# Altium PCB PCB_GUNV_2.PcbDoc
Units mm, origin at the board's own origin, x right, y up, seen from the top; angles counter-clockwise.
Board outline 14.5 x 13.7 mm, 2 copper layers (Top Layer, Bottom Layer), stack 1.036 mm thick; 34 components, 16 nets, 67 pads, 18 vias.
Unrouted connection lines stored in the file: 50.
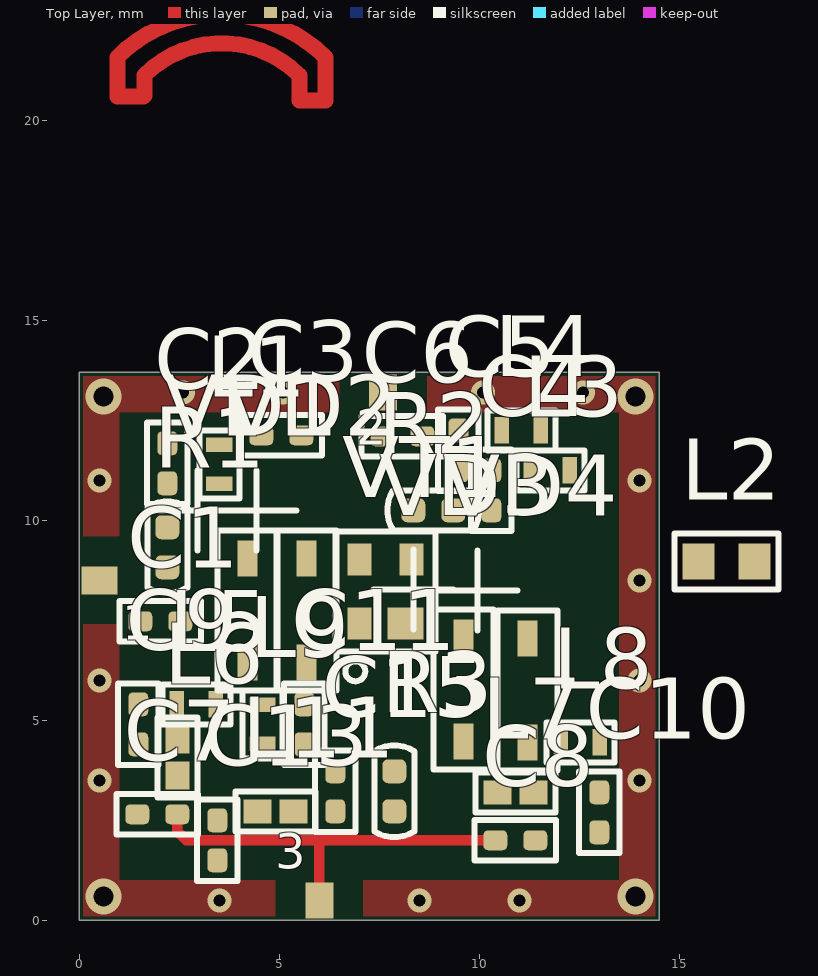
[diagram p0: Top Layer view]
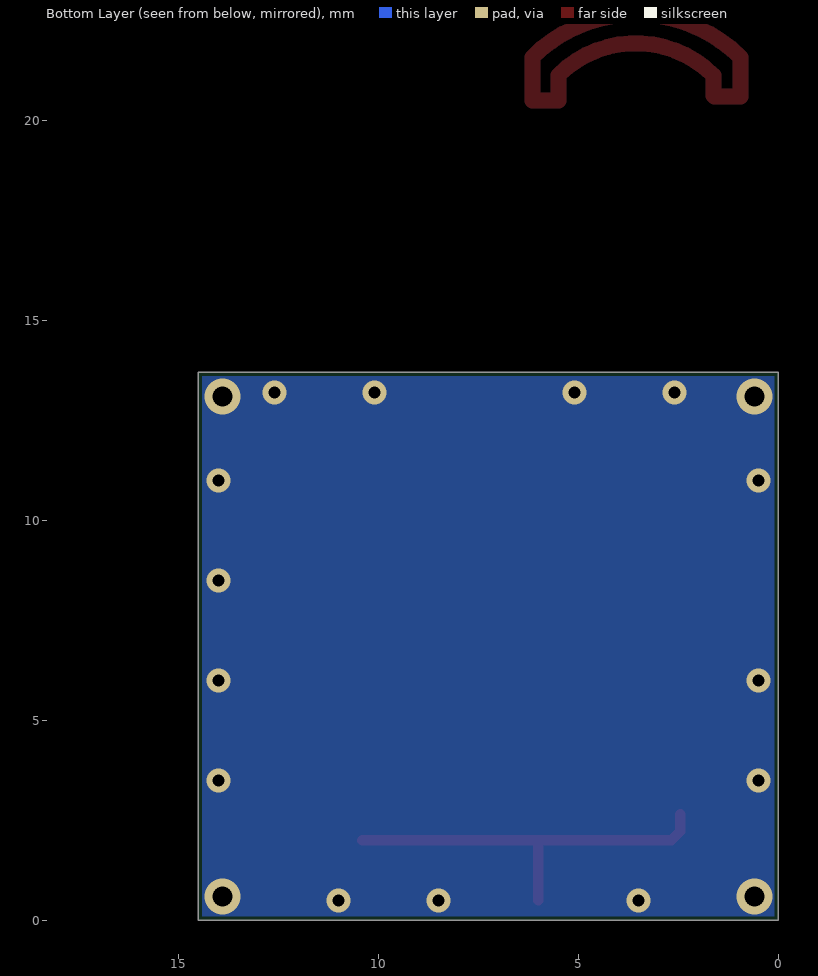
[diagram p1: Bottom Layer view, seen from below]

## Layer stack, top to bottom
Top Solder: solder mask 0.025, Solder Resist, Dk 3.5
Top Layer: signal copper 0.018
Dielectric 1: core 1, FR4, Dk 4.6
Bottom Layer: signal copper 0.018
Bottom Solder: solder mask 0.025, Solder Resist, Dk 3.5

## Board outline
0,0 0,13.7 14.5,13.7 14.5,0

## Design rules (kind name [scope] priority, off if disabled: settings)
Clearance [All] p1: gap=0.3 ignorepadtopadclearanceinfootprint=FALSE
ComponentClearance [All] p1: gap=0.2 collisioncheckmode=3 verticalgap=5 showdistances=FALSE
HoleSize [All] p1: absolutevalues=TRUE maxlimit=5 minlimit=0.025 maxpercent=80.000 minpercent=20.000
HoleToHoleClearance [All] p1: gap=0.3 allowstackedmicrovias=TRUE
MinimumSolderMaskSliver [All] p1: minsoldermaskwidth=0.12
PlaneConnect [All] p1: planeconnectstyle=Direct reliefexpansion=0.508 reliefentries=4 reliefconductorwidth=0.254 reliefairgap=0.254
PolygonConnect [All] p1: connectstyle=Direct reliefconductorwidth=0.254 reliefentries=4 polygonreliefangle="90 Angle" airgapwidth=0.254
RoomDefinition Sheet1 [InComponentClass('Sheet1')] p1: confinementstyle=ConfineIn formatcopy=TRUE lockcomponents=FALSE outline 15.629,1.551 150.729,1.551 150.729,7.651 15.629,7.651
RoutingVias [All] p1: holewidth=0.711 width=1.27 viastyle="Through Hole" minholewidth=0.711 minwidth=1.27 maxholewidth=0.711 maxwidth=1.27
ShortCircuit [All] p1: allowed=TRUE
SilkToSilkClearance [All] p1: silktosilkclearance=0
SilkToSolderMaskClearance [IsPad] p1: minsilkscreentomaskgap=0 clearancetoexposedcopper=TRUE
SolderMaskExpansion [All] p1: expansion=0.12
Width [All] p1: maxlimit=0.5 minlimit=0.254 preferedwidth=0.3 minimp=50.000000 maximp=50.000000 favimp=50.000000
22 further rules are at their usual default settings.

## Components (designator, comment, footprint, x,y, rotation, side; value= is the part's Value field where it differs from the comment)
1 "TP" TP1#1 0.5,8.5 r90 top locked
2 "TP" TP1#2 7.6,13.2 r90 top locked
3 "TP" TP1#3 6,0.5 r90 top locked
C1 "330" CAPC1005L 2.025,7.475 r0 top
C2 "330" CAPC1005L 2.2,11.425 r270 top
C3 "12" CAPC1005L 5.05,12.125 r180 top
C4 "{Value}" CAPC1005L 10.3,10.75 r270 top
C5 "{Value}" CAPC1005L 9.475,11.75 r270 top
C6 "{Value}" CAPC1005L 8.075,12.1 r0 top
C7 "330" CAPC1005L 1.95,2.65 r0 top
C8 "330" CAPC1005L 10.9,2 r180 top
C9 "33" CAPC1005L 1.475,4.9 r270 top
C10 "33" CAPC1005L 13,2.7 r270 top
C11 "100" CAPC1005L 5.625,4.9 r90 top
C13 "100" CAPC1005L 3.45,2 r90 top
C15 "330" CAPC1005L 6.4,3.225 r270 top
L1 "16" INDC1107X07N 3.5,11.4 r0 top
L2 "180" INDC1608L 16.175,8.975 r0 top
L3 "{Value}" INDC1107X07N 11.775,11.25 r90 top
L4 "{Value}" INDC1107X07N 11.05,12.25 r90 top
L5 "39" INDC1107X07N 2.925,5.4 r90 top
L6 "100" INDC1005L 2.45,4.075 r90 top
L7 "100" INDC1005L 10.9,3.2 r180 top
L8 "39" INDC1107X07N 12.525,4.45 r90 top
L9 "39" INDC1107X07N 4.575,4.9 r180 top
L11 "220" INDC1005L 4.9,2.725 r0 top
R1 "330" RESC1005L 2.2,9.325 r90 top
R2 "{Value}" RESC1005L 8.85,10.25 r180 top
R3 "1 к" RESC1005L 7.875,3.225 r270 top
VD1 "BB149" SOD2512X100N 4.2,7.75 r90 top
VD2 "BB149" SOD2512X100N 5.675,7.75 r90 top
VD3 "BB149" SOD2512X100N 9.6,5.775 r90 top
VD4 "BB149" SOD2512X100N 11.2,5.75 r90 top
VT1 "" SOT130P210X100-4N 7.65,8.225 r0 top

## Footprints (in the part's own frame and the unit in brackets; to place one, negate y for a bottom-side part, rotate by r counter-clockwise, add the part's x,y. Pads: shape width x height; smd on the part's side, far side on the other; paste and mask are expansions set on the pad)
CAPC1005L [mm] "Chip Capacitor, Body 1.0x0.5mm, IPC High Density"
  rrect50% 0.6x0.5 smd: 1(-0.5,0) 2(0.5,0)
  Top Layer pour cut-out: -0.2,0.5 -0.2,-0.5 0.2,-0.5 0.2,0.5
  silkscreen extent -1.02,-0.51 1.02,0.51, body extent -0.55,-0.3 0.55,0.3, height 0.6
INDC1005L [mm] "Chip Inductor, Body 1.0x0.5mm, IPC High Density"
  rect 0.7x0.6 smd: 1(-0.45,0) 2(0.45,0)
  silkscreen extent -1,-0.5 1,0.5, body extent -0.55,-0.35 0.55,0.35, height 0.6
INDC1107X07N [mm] "Chip Inductor, 2-Leads, Body 1,11x0,66mm, IPC Medium Density"
  rect 0.66x0.36 smd mask+0.05: 1(0,-0.485) 2(0,0.485)
  Top Layer pour cut-out: -0.33,0.3 -0.33,-0.3 0.33,-0.3 0.33,0.3
  silkscreen extent -0.5,-0.85 0.5,0.85, body extent -0.33,-0.55 0.33,0.56, height 0.65
INDC1608L [mm] "Chip Inductor, Body 1.6x0.8mm, IPC High Density"
  rect 0.8x0.9 smd: 1(-0.7,0) 2(0.7,0)
  Top Layer pour cut-out: -0.3,0.7 -0.3,-0.7 0.3,-0.7 0.3,0.7
  silkscreen extent -1.3,-0.7 1.3,0.7, body extent -0.87,-0.48 0.87,0.48, height 0.71
RESC1005L [mm] "Chip Resistor, Body 1.1x0.5mm, IPC High Density"
  rrect50% 0.6x0.6 smd: 1(-0.5,0) 2(0.5,0)
  Top Layer pour cut-out: -0.2,0.5 -0.2,-0.5 0.2,-0.5 0.2,0.5
  silkscreen extent -1.15,-0.5 1.15,0.5, body extent -0.55,-0.3 0.55,0.3, height 0.4
SOD2512X100N [mm] "SOD Diode; 1.8mm W X 1.35mm L X 1.00mm H Body"
  rect 0.9x0.5 smd: 1(-1.3,0) 2(1.3,0)
  silkscreen extent -2,-0.75 3.5,2.25, body extent -1.25,-0.62 1.25,0.63, height 0.96
SOT130P210X100-4N [mm] "SOT343, 4-Leads, Body 2,00x2,10mm, Pitch 1,30mm, IPC Medium Density"
  rect 0.6x0.8 smd: 1(-0.65,-0.8) 3(0.65,0.8) 4(-0.65,0.8)
  rect 0.9x0.8 smd: 2(0.5,-0.8)
  silkscreen extent -1.25,-2.25 1.25,1.5, body extent -1,-1.05 1,1.05, height 0.96
TP1#1 [mm] "Test point 1x1.6"
  rect 0.7x0.9 smd mask+0.05: 1(0,0)
TP1#2 [mm] "Test point 1x1.6"
  rect 0.9x0.7 smd mask+0.05: 1(0,0.01)
TP1#3 [mm] "Test point 1x1.6"
  rect 0.9x0.7 smd mask+0.05: 1(0,0)

## Part data
1 2 3: "Test point"
C1 C2 C7 C8 C15: library part i6124B5A08767D00004E, "Чип-конденсатор", ManufacturerPartNumber="GRM1555C1H331JA01* Murata", Power/Voltage="50 В", Tolerance="±5 %", ImKey=i6124B5A08767D00004E, Name=0402, PCADLibrary=PASSIV.LIB, PCADPattern=C0402, PCADSymbol=C, PCADType=C0402, TKE/TKC=C0G, Type=Конденсатор
C3: library part i6124B5A08767D00007A, "Чип-конденсатор", ManufacturerPartNumber="GCM1555C1H120JA16* Murata", Power/Voltage="50 В", Tolerance="±5 %", ImKey=i6124B5A08767D00007A, Name=0402, PCADLibrary=PASSIV.LIB, PCADPattern=C0402, PCADSymbol=C, PCADType=C0402, TKE/TKC=C0G, Type=Конденсатор
C4 C5 C6: library part C0402, "Чип-конденсатор", Power/Voltage={Voltage}, Tolerance={Tolerance}, Name=0402, TKE/TKC={TKE/TKC}, Type=Конденсатор
C9 C10: library part i6124B5A08767D000030, "Чип-конденсатор", ManufacturerPartNumber="GRM1555C1H330JA01* Murata", Power/Voltage="50 В", Tolerance="±5 %", ImKey=i6124B5A08767D000030, Name=0402, PCADLibrary=PASSIV.LIB, PCADPattern=C0402, PCADSymbol=C, PCADType=C0402, TKE/TKC=C0G, Type=Конденсатор
C11 C13: library part i6124B5A08767D000072, "Чип-конденсатор", ManufacturerPartNumber="GCM1555C1H101JA16* Murata", Power/Voltage="50 В", Tolerance="±5 %", ImKey=i6124B5A08767D000072, Name=0402, PCADLibrary=PASSIV.LIB, PCADPattern=C0402, PCADSymbol=C, PCADType=C0402, TKE/TKC=C0G, Type=Конденсатор
L1: library part i6124B5A0876BE00000C, "Индуктивность без магнитопровода", ManufacturerPartNumber="0402DC-16NXJR* Coilcraft", Tolerance="±5 %", ImKey=i6124B5A0876BE00000C, Name=0402DC, PCADLibrary=PASSIV.LIB, PCADPattern=L0402M, PCADSymbol=INDUCT, PCADType=L-0402, Type=Индуктивность
L2: library part i6124B5A0876B6000015, "Индуктивность без магнитопровода", ManufacturerPartNumber="0603CS-R18XJE* Coilcraft", Tolerance="±5 %", ImKey=i6124B5A0876B6000015, Name=0603, PCADLibrary=PASSIV.LIB, PCADPattern=L0603M, PCADSymbol=INDUCT, PCADType=L-0603, Type=Индуктивность
L3 L4: library part L0402DC, "Индуктивность без магнитопровода", Tolerance={Tolerance}, Name=0402DC, Type=Индуктивность
L5 L8 L9: library part i6124B5A0876BE000006, "Индуктивность без магнитопровода", ManufacturerPartNumber="0402DC-39NXJR* Coilcraft", Tolerance="±5 %", ImKey=i6124B5A0876BE000006, Name=0402DC, PCADLibrary=PASSIV.LIB, PCADPattern=L0402M, PCADSymbol=INDUCT, PCADType=L-0402, Type=Индуктивность
L6 L7 L11: library part L0402, "Индуктивность без магнитопровода", Tolerance={Tolerance}, BCPId=100, Name=0402, Type=Индуктивность
R1: library part i6124B5A0876CB00001D, "Чип-резистор", ManufacturerPartNumber="CR0402-JW-331GLF Bourns", Tolerance="±5 %", ImKey=i6124B5A0876CB00001D, Name=0402, PCADLibrary=PASSIV.LIB, PCADPattern=R0402, PCADSymbol=R, PCADType=R0402, Type=Резистор
R2: library part R0402, "Чип-резистор", Tolerance={Tolerance}, Name=0402, Type=Резистор
R3: library part i6124B5A0876CB000025, "Чип-резистор", ManufacturerPartNumber="CR0402-JW-102GLF Bourns", Tolerance="±5 %", ImKey=i6124B5A0876CB000025, Name=0402, PCADLibrary=PASSIV.LIB, PCADPattern=R0402, PCADSymbol=R, PCADType=R0402, Type=Резистор
VD1 VD2 VD3 VD4: "UHF variable capacitance diode", Manufacturer=NXP, ManufacturerPartNumber=BB149A, Package="SC-76 (SOD323)", SymAuthor="Юдин Д.Г.", Type=Диод
VT1: library part BFP540, "Low Noise Silicon Bipolar RF Transistor", Manufacturer=Infineon, Package=SOT343, ManufacturerPartNumber=BFP540, Type=Транзистор

## Via types
v1: diameter 0.6, hole 0.3, Top Layer to Bottom Layer, tented both sides, 14 vias
v2: diameter 0.9, hole 0.5, Top Layer to Bottom Layer, 4 vias

## Nets (pads, with @x,y where several pads share a name; then routed paths per layer and width w, separated by ;. In a path a pad name is that pad's centre, name@x,y a point inside that pad or via, vN(x,y) a via of type N, cw(c..) or ccw(c..) an arc to the next point about the centre after c; other vN are vias at no path point)
GND: C1.1 C2.1 C3.1 C7.1 C8.1 C9.2 C10.2 C11.1 C13.1 C15.1 L3.1 L4.1 VD1.2 VD2.2 VD3.2 VD4.2 VT1.2 VT1.4
  other v1: 3.5,0.5 8.5,0.5 11,0.5 0.5,3.5 14,3.5 0.5,6 14,6 14,8.5 0.5,11 14,11 2.59,13.2 5.09,13.2 10.09,13.2 12.59,13.2
  other v2: 0.6,0.6 13.9,0.6 0.6,13.1 13.9,13.1
Net1_1: 1.1 R1.1
Net2_1: 2.1 C6.1
Net3_1: 3.1 C7.2 C8.2 L6.1 L7.2 | length 10
  Top Layer w0.254: C7.2 2.45,2.225 2.675,2 6,2 ; 3.1 6,2 ; C8.2 6,2
NetC1_2: C1.2 C2.2 L1.1 L2.1 R1.2 R3.1
NetC3_2: C3.2 L1.2 L2.2 R2.2 VT1.3
NetC4_1: C4.1 C5.2 L3.2
NetC4_2: C4.2 R2.1
NetC5_1: C5.1 C6.2 L4.2
NetC9_1: C9.1 L5.2 L6.2
NetC10_1: C10.1 L7.1 L8.1
NetC11_2: C11.2 L9.1 VT1.1
NetC13_2: C13.2 L9.2 L11.1
NetC15_2: C15.2 L11.2 R3.2
NetL5_1: L5.1 VD1.1 VD2.1
NetL8_2: L8.2 VD3.1 VD4.1
copper on no net: | length 14.6
  Top Layer w0.4: 1.6,20.6 0.95,20.6 0.95,21.575 cw(c3.55,18.975) 6.15,21.575 6.15,20.5 5.5,20.5 5.5,21.125 ccw(c3.563,19.188) 1.625,21.125 1.625,20.625

## Polygon pours and split planes (outlines as drawn)
GND on Top Layer "GND Layer" (solid, pour order 10): 8.7,13.6 8.7,12.7 13.5,12.7 13.5,11.107 13.5,9.9 13.5,1 9,1 8.405,1 7.1,1 7.1,0.1 14.4,0.1 14.4,13.6
GND on Top Layer "GND Layer" (solid, pour order 8): 0.1,7.4 1,7.4 1,4.3 1,2.6 1,1 4.9,1 4.9,0.1 0.1,0.1
GND on Top Layer "GND Layer" (solid, pour order 6): 0.1,13.6 6.5,13.6 6.5,12.7 1,12.7 1,10.1 1,9.6 0.1,9.6
GND on Bottom Layer "GND Layer" (solid, pour order 12): 0.1,13.6 0.1,0.1 14.4,0.1 14.4,13.6

## Silkscreen, mask and mechanical layers (free items; w line width, h text height)
Top Solder:
  region: 6.5,13.7 8.7,13.7 8.7,12.701 8.701,12.7 6.5,12.7
  region: 4.9,1 7.1,1 7.1,0.001 7.101,0 4.9,0
  region: 1,9.6 1,7.4 0.001,7.4 0,7.399 0,9.6
Mechanical 2:
  the board outline again, w0.4